# Altium PCB LockSafe.PcbDoc (part 2 of 2)
Units mil, origin at the board's own origin, x right, y up, seen from the top; angles counter-clockwise.
Board outline 2362.21 x 2362.21 mil, 4 copper layers (Top Layer, GroundPlane, PowerPlane, Bottom Layer), stack 58.4 mil thick; 124 components, 73 nets, 373 pads, 16 vias.
Unrouted connection lines stored in the file: 228.
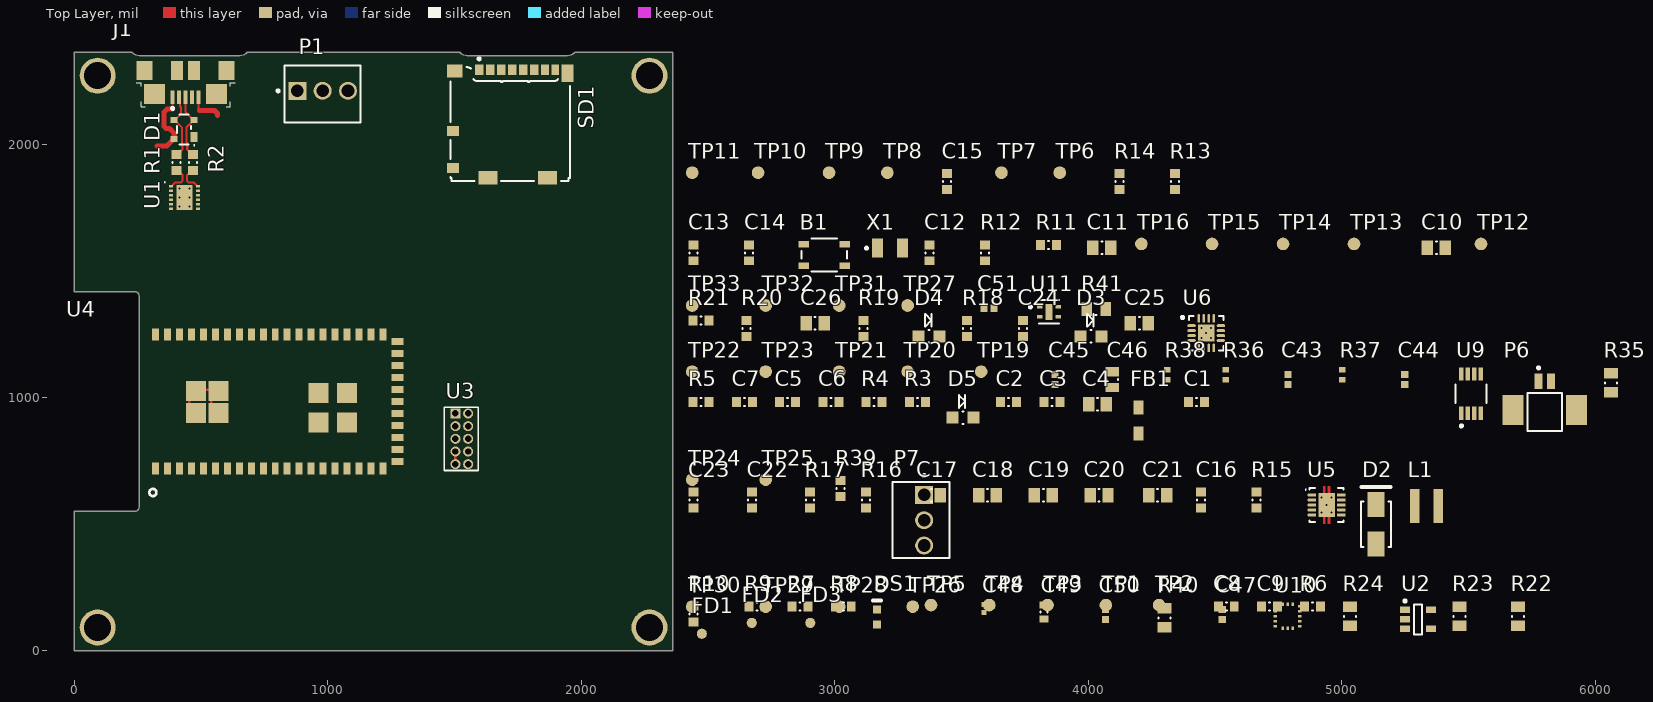
[diagram p0: Top Layer view]

## Via types
v1: diameter 19.68, hole 7.87, Top Layer to Bottom Layer, 11 vias
v2: diameter 19.68, hole 7.87, Top Layer to Bottom Layer, tented top, 5 vias

## Nets (pads, with @x,y where several pads share a name; then routed paths per layer and width w, separated by ;. In a path a pad name is that pad's centre, name@x,y a point inside that pad or via, vN(x,y) a via of type N, cw(c..) or ccw(c..) an arc to the next point about the centre after c; other vN are vias at no path point)
3V3: C10.2 C11.2 C15.2 R7.1 R11.2 R13.2 R14.2 R24.2 SD1.4 TP6.1 TP12.1 U3.1 U4.7 U4.21
3V3_ACCEL: R40.1 TP26.1 U10.4 U10.5
3V3_TEMP: R41.1 TP27.1
6V: R22.2
6V_out: C20.2 C21.2 D2.2 R15.2 R22.1
6V_SERVO: R39.1
ACCEL_I2C_SCL: TP29.1 U10.2
ACCEL_I2C_SDA: TP28.1 U10.3
ACCEL_INT: TP30.1 U10.6
BQ_BAT_TS: R6.1 TP5.1 U6.1
BQ_ILIM: R20.2 U6.12
BQ_ISET: R21.2 U6.16
CBUS0: D5.2 U1.6
FLASH_MEM_SPI_SS: R13.1 SD1.2 TP11.1 U4.37
GND: B1.3 B1.4 C1.1 C2.1 C3.1 C4.1 C5.1 C6.1 C7.1 C8.1 C9.1 C10.1 C11.1 C12.1 C13.1 C14.1 C15.1 C16.1 C17.1 C18.1 C19.1 C20.1 C21.1 C22.1 C23.1 C24.1 C25.1 C26.2 D1.1 J1.5 J1.6 J1.7 J1.8 J1.9 J1.10 J1.11 P1.1 R6.2 R16.1 R20.1 R21.1 SD1.6 SD1.10 SD1.11 SD1.12 TP3.1 TP13.1 U1.5 U1.13 U2.2 U3.3 U3.5 U3.9 U4.0 U4.1 U4.10 U4.17 U4.20 U4.32 U4.42 U4.51 U5.4 U5.5 U5.11 U6.4 U6.5 U6.8 U6.14 U6.15 U6.17 | length 446.7
  Top Layer w8: J1.5 490.76,2136.24 494,2133
  Top Layer w10: U4.0@453.25,945.22 453.25,1031.13 540.57,1031.13 U4.0@540.57,945.22 ; U3.9 1504,787
  Top Layer w20: 494,2133 495,2132 553.28,2132 565,2120.28 565,2112
  other v1: 4921.31,546.47 4960.69,546.47 4941,576 4921.31,605.53 4960.69,605.53 415.17,1754.28 454.54,1754.28 415.17,1789.71 454.54,1789.71 415.17,1825.14 454.54,1825.14
  other v2: 4446.32,1234.31 4485.69,1234.31 4466,1254 4446.31,1273.69 4485.69,1273.69
MCU_LED: DS1.2 U4.16
MCU_RESET: C12.2 R11.1 R12.2 TP16.1 U3.10 U4.24
MCU_RX_UART_CLI: TP4.1 U1.7 U4.44
MCU_TX_UART_CLI: TP2.1 U1.10 U4.43
MEM_SPI_CLK: R10.2 SD1.5 TP10.1
MEM_SPI_MISO: R9.2 SD1.7 TP9.1
MEM_SPI_MOSI: R8.2 SD1.3 TP8.1
NetB1_1: B1.1 B1.2 R12.1
NetC9_2: C9.2 R24.1 U2.5
NetC22_2: C22.2 U5.10
NetC23_2: C23.2 R17.1
NetC47_2: C47.2 U10.14
NetC48_2: C48.2 C49.2 C50.2 R40.2 U10.1 U10.16
NetC51_2: C51.2 R41.2 U11.1
NetD2_1: D2.1 L1.2 U5.6 U5.7
NetD3_2: D3.2 R18.2
NetD4_2: D4.2 R19.2
NetD5_1: D5.1 R3.1
NetDS1_1: DS1.1 R7.2
NetP7_2: P7.2 R39.2
NetR15_1: R15.1 R16.2 U5.2
NetR17_2: R17.2 U5.1
NetR18_1: R18.1 U6.9
NetR19_1: R19.1 U6.7
RS: C7.2 R4.2 R5.2 U1.2
SD_CARD_DETECT: R14.1 SD1.9 TP7.1
SERCOM1_PAD2_SPI_MISO: R9.1 U4.8
SERCOM1_PAD2_SPI_MOSI: R8.1 U4.11
SERCOM1_PAD3_SPI_SCK: R10.1 U4.12
SERVO_PWM: P7.3 TP24.1
SPKR_EN: R38.2 U9.1
SPKR_IN+: R36.2 TP21.1 U9.3
SPKR_IN-: R37.2 TP22.1 U9.4
SPKR_SIG_N: C44.2
SPKR_SIG_N_AC: C44.1 R37.1
SPKR_SIG_P: C43.2
SPKR_SIG_P_AC: C43.1 R36.1
SPKR_VO+: P6.2 TP20.1 U9.5
SPKR_VO-: P6.1 TP19.1 U9.8
SWCLK: TP15.1 U3.4 U4.25
SWDIO: TP14.1 U3.2 U4.26
TEMP_ENABLE: TP33.1 U11.5
TEMP_I2C_SCL: TP32.1 U11.2
TEMP_I2C_SDA: TP31.1 U11.3
USB_DATA_N: C5.2 D1.3 J1.2 R1.1 | length 265
  Top Layer w8: D1.3 D1.3@396.48,2093.93 ; R1.1@404,1961.5 417.72,1975.21 423.23,1975.21 427.91,1979.9 427.91,1991.21 424.88,1994.25 424.88,2065.53 D1.3@396.48,2093.93 ; J1.2 417.87,2180.81 417.87,2148.84 421.71,2145 421.71,2119.16 D1.3@396.48,2093.93
USB_DATA_P: C6.2 D1.2 J1.3 R2.1 | length 258.2
  Top Layer w8: J1.3@442.88,2176 439.71,2172.83 439.71,2125.5 D1.2@471.28,2093.93 ; R2.1 455.28,1973.21 450.6,1973.21 445.91,1977.9 445.91,2003.13 442.88,2006.17 442.88,2065.53 D1.2@471.28,2093.93 ; D1.2 D1.2@471.28,2093.93
USB_FTDI_DATA_N: R1.2 U1.1 | length 108.8
  Top Layer w8: U1.1 384.65,1834 393.35,1842.7 393.35,1843.06 399.21,1848.92 421.16,1848.92 427.5,1855.26 427.5,1878.1 422.81,1882.79 417.72,1882.79 R1.2
USB_FTDI_DATA_P: R2.2 U1.12 | length 106.5
  Top Layer w8: R2.2 455.28,1882.79 450.19,1882.79 445.5,1878.1 445.5,1853.61 450.19,1848.92 470.49,1848.92 476.35,1843.06 476.35,1842.7 485.05,1834 U1.12
VBAT: C26.1 P1.3 U6.2 U6.3
VBUS: C2.2 D1.4 FB1.1 J1.1 | length 297.1
  Top Layer w8: 388.4,2137.6 J1.1
  Top Layer w20: 326,1992 365.41,1992 392.03,2018.62 394,2018.62 D1.4 394.51,2042.28 375.79,2061 363,2061 354,2070 354,2125.88 365.72,2137.6 388.4,2137.6
VCCIO: C1.2 R4.1 U1.3 U1.9
VDD: C45.2 C46.2 R35.2 U9.6
VOUT: C8.2 C16.2 C17.2 C18.2 C19.2 L1.1 R23.2 U2.1 U2.3 U5.3 U5.8 U5.9
Vout_BQ: C25.2 D3.1 D4.1 R23.1 U6.6 U6.10 U6.11
VSPKR: R35.1
VUSB: C3.2 C4.2 C24.2 FB1.2 R3.2 R5.1 TP1.1 U1.4 U6.13
XIN_32: C13.2 U4.29 X1.1
XOUT_32: C14.2 U4.30 X1.2
pads on no net: C45.1 C46.1 C47.1 C48.1 C49.1 C50.1 C51.1 FD1. FD2. FD3. J1.4 P1.2 P6.MP1 P6.MP2 P7.1 R38.1 SD1.1 SD1.8 SD1.13 SD1.14 TP23.1 TP25.1 U1.8 U1.11 U2.4 U3.6 U3.7 U3.8 U4.2 U4.3 U4.4 U4.5 U4.6 U4.9 U4.13 U4.14 U4.15 U4.18 U4.19 U4.22 U4.23 U4.27 U4.28 U4.31 U4.33 U4.34 U4.35 U4.36 U4.38 U4.39 U4.40 U4.41 U4.45 U4.46 U4.47 U4.48 U4.49 U4.50 U9.2 U9.7 U10.7 U10.8 U10.9 U10.10 U10.11 U10.12 U10.13 U10.15 U11.4

## Silkscreen, mask and mechanical layers (free items; w line width, h text height)
Mechanical 4:
  the board outline again, w20

## Text inside footprints (layer, text, board x,y; h text height)
J1: Mechanical 1 "Board edge" at 219.58,2342.34 h7.87 r180